# Altium PCB PCB1.PcbDoc
Units mil, origin at the board's own origin, x right, y up, seen from the top; angles counter-clockwise.
Board outline 1869.87 x 1869.87 mil, 2 copper layers (Top Layer, Bottom Layer); 39 components, 22 nets, 157 pads, 45 vias.
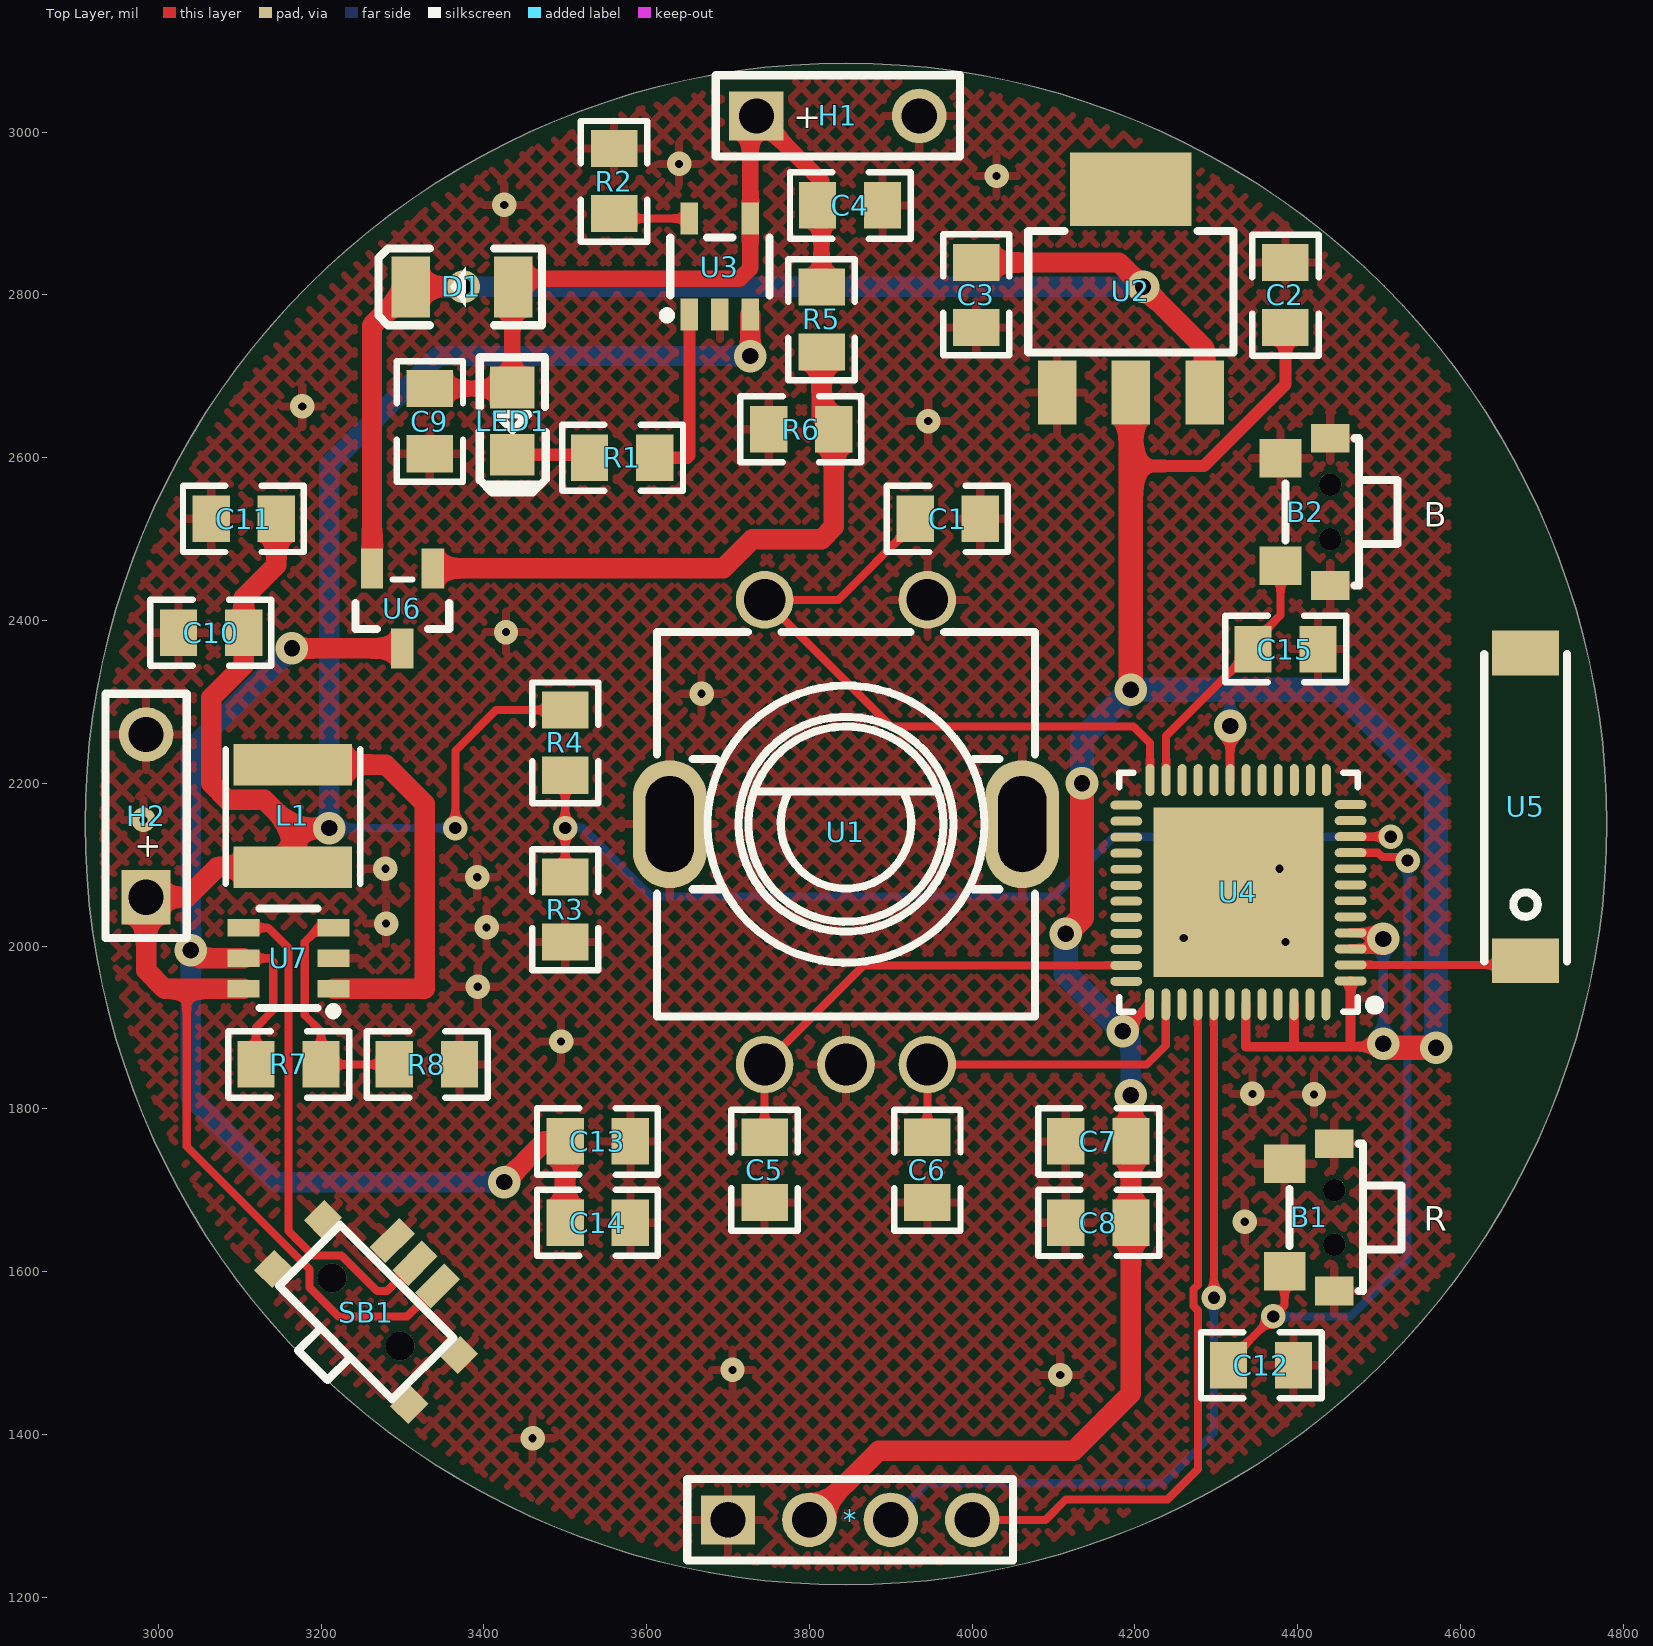
[diagram p0: Top Layer view]
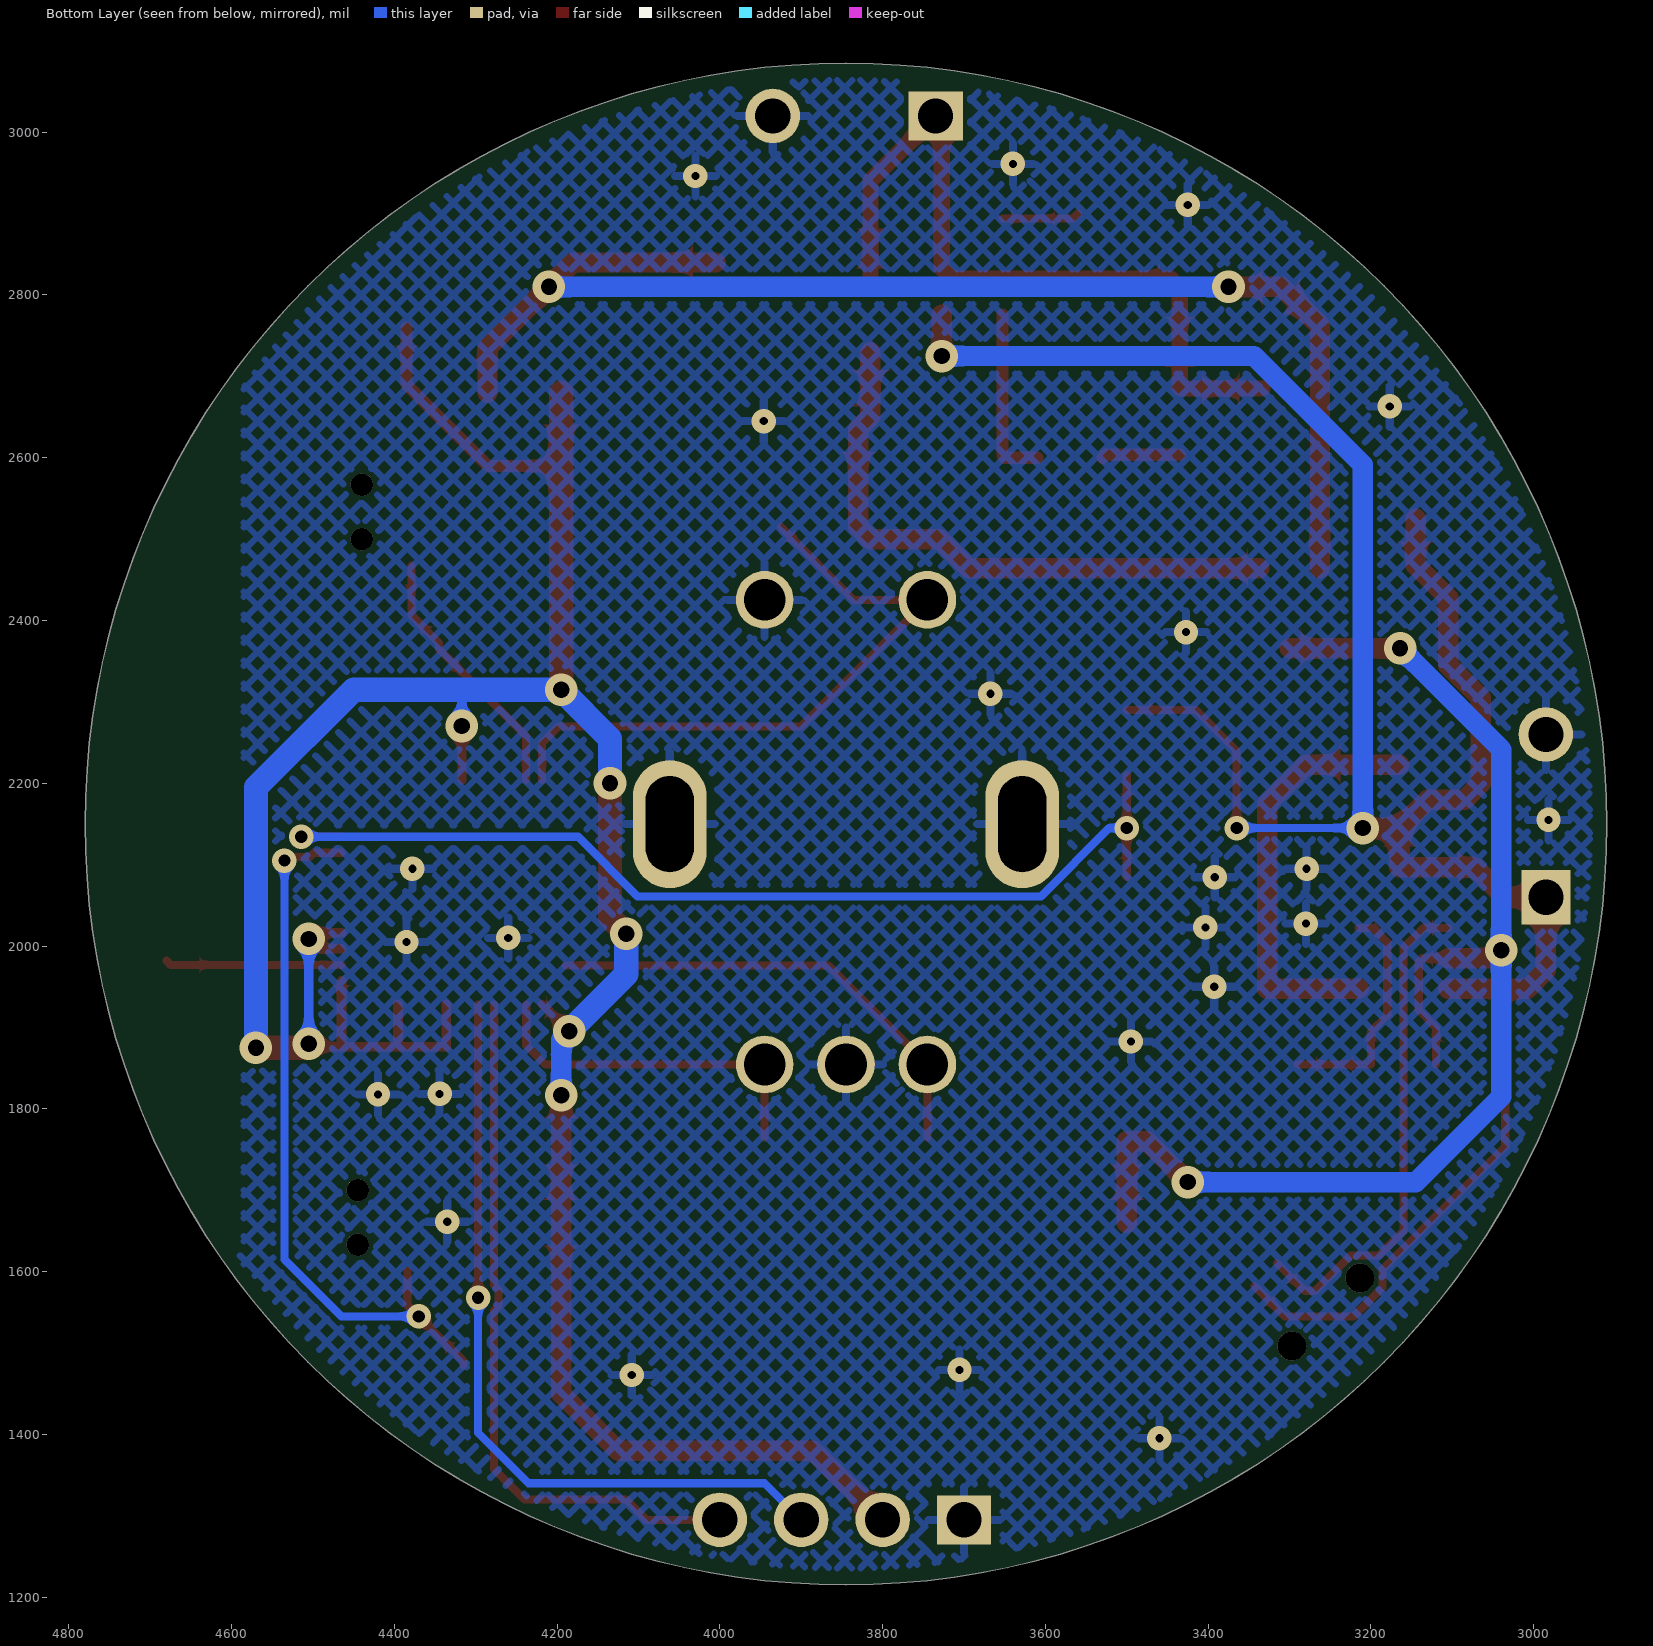
[diagram p1: Bottom Layer view, seen from below]

## Layer stack, top to bottom
Top Solder: solder mask 0.4, Solder Resist, Dk 3.5
Top Layer: signal copper 1.4
Dielectric 1: dielectric 12.6, FR-4, Dk 4.8
Bottom Layer: signal copper 1.4
Bottom Solder: solder mask 0.4, Solder Resist, Dk 3.5

## Board outline
2910.07,2150 ccw(c3845,2150) 3845,1215.07 ccw(c3845,2150) 4779.93,2150 ccw(c3845,2150) 3845,3084.93 ccw(c3845,2150)

## Design rules (kind name [scope] priority, off if disabled: settings)
Clearance [All] p1: gap=5 ignorepadtopadclearanceinfootprint=FALSE
HoleSize HoleSize_1 [All] p1: absolutevalues=TRUE maxlimit=100 minlimit=1 maxpercent=80.000 minpercent=20.000
HoleSize [All] p2: absolutevalues=TRUE maxlimit=100 minlimit=1 maxpercent=80.000 minpercent=20.000
PolygonConnect [All] p1: connectstyle=Relief reliefconductorwidth=10 reliefentries=4 polygonreliefangle="90 Angle" airgapwidth=10
RoutingVias [All] p1: holewidth=15 width=30 viastyle="Through Hole" minholewidth=12 minwidth=24 maxholewidth=28 maxwidth=50
SolderMaskExpansion [All] p1: expansion=4
Width [All] p1: maxlimit=30 minlimit=5 preferedwidth=10 minimp=50.000000 maximp=50.000000 favimp=50.000000
29 further rules are at their usual default settings.

## Components (designator, comment, footprint, x,y, rotation, side; value= is the part's Value field where it differs from the comment)
* "h4" pin4 3700,1295 r0 top
B1 "button" button 4445,1700 r0 top
B2 "button" button 4440,2566.93 r0 top
C1 "0.1uf" 0805CAP 3970,2525 r0 top
C2 "10uF" 0805CAP 4385,2800 r90 top
C3 "10uF" 0805CAP 4005,2800 r270 top
C4 "22uf" 0805CAP 3850,2910 r180 top
C5 "0.1uf" 0805CAP 3745,1725 r90 top
C6 "0.1uf" 0805CAP 3945,1725 r90 top
C7 "0.1uf" 0805CAP 4155,1760 r180 top
C8 "10uf" 0805CAP 4155,1660 r180 top
C9 "1uF" 0805CAP 3333.62,2645 r90 top
C10 "10uF" 0805CAP 3065,2385 r0 top
C11 "0.1uF" 0805CAP 3105,2525 r0 top
C12 "0.1uf" 0805CAP 4355,1485 r180 top
C13 "0.1uF" 0805CAP 3540,1760 r0 top
C14 "22uF" 0805CAP 3540,1660 r0 top
C15 "0.1uf" 0805CAP 4385,2365 r180 top
D1 "D" 1206D 3377.99,2810 r0 top
H1 "BAT" BAT 3835,3020 r0 top
H2 "BAT" BAT 2985,2160 r90 top
L1 "10uH" LND 3165,2160 r270 top
LED1 "LED" 0805LED 3435,2645 r90 top
R1 "300R" 0805R 3570,2600 r180 top
R2 "2K" 0805R 3560,2940 r90 top
R3 "100k" 0805R 3500,2045 r90 top
R4 "100k" 0805R 3500,2250 r90 top
R5 "1k" 0805R 3815,2770 r90 top
R6 "10k" 0805R 3790,2635 r0 top
R7 "525k" 0805R 3160,1854.57 r180 top
R8 "100k" 0805R 3330,1854.57 r180 top
SB1 "SWITCH" SB 3270,1565 r45 top
U1 "旋转编码器" SW-TH_EC11XXXXXXXX 3845,2140 r0 top
U2 "AMS1117-3.3" AMS1117-3.3 4195,2805 r270 top
U3 "AP5054BES5" AP5054BES5 3690,2835 r0 top
U4 "ESP32" ESP32_PICO 4327.2,2066.2 r90 top
U5 "2.4G天线" 2.4G天线 4680,1982.05 r90 top
U6 "MOS" PMOS 3300,2415 r90 top
U7 "DC-DC" FP6715S6CTR 3160,1985 r90 top

## Footprints (in the part's own frame and the unit in brackets; to place one, negate y for a bottom-side part, rotate by r counter-clockwise, add the part's x,y. Pads: shape width x height; smd on the part's side, far side on the other; paste and mask are expansions set on the pad)
2.4G天线 [mil]
  rect 55.12x82.68 smd: 1(0,0) 2(377.95,0)
  silkscreen extent -1,-51 377,51
0805CAP [mm]
  rect 1.16x1.45 smd: 1(-1.016,0) 2(1.016,0)
  silkscreen extent -1.9,-1.03 1.87,1.04
0805LED [mil]
  rect 51.2x55.1 smd: 1(41.35,0) 2(-41.35,0)
  silkscreen extent -88,-41 78,40
0805R [mm]
  rect 1.16x1.45 smd: 1(-1.016,0) 2(1.016,0)
  silkscreen extent -1.9,-1.03 1.87,1.04
1206D [mm]
  rect 1.2x1.9 smd: 1(1.473,0) 2(-1.727,0)
  silkscreen extent -2.73,-1.2 2.37,1.2
AMS1117-3.3 [mm]
  rect 2x1.2 smd: 1(3.175,-2.3) 2(3.175,0) 3(3.175,2.3)
  rect 2.3x3.8 smd: 4(-3.175,0)
  silkscreen extent -1.87,-3.2 1.93,3.2
AP5054BES5 [mm]
  rect 0.55x1 smd: 1(-0.95,-1.5) 2(0,-1.5) 3(0.95,-1.5) 4(0.95,1.5) 5(-0.95,1.5)
  silkscreen extent -1.78,-1.65 1.55,0.9
BAT [mm]
  rect 1.7x1.524 hole 1.1: 1(-2.54,0)
  round 1.7 hole 1.1: 2(2.54,0)
  silkscreen extent -3.81,-1.27 3.81,1.27
button [mm]
  rect 1.2x0.9 smd: 1(0,1.45) 2(0,-3.15)
  rect 1.3x1.2 smd: 3(-1.55,0.825) 4(-1.55,-2.525)
  round 0.7 hole 0.7 unplated: ""(0,-1.7) ""(0,0)
  silkscreen extent -1.4,-3.15 2.1,1.45
ESP32_PICO [mm]
  oval 0.28x0.996 smd: 1(-2.769,-3.5) 2(-2.268,-3.5) 3(-1.768,-3.5) 4(-1.267,-3.5) 5(-0.767,-3.5) 6(-0.267,-3.5) 7(0.231,-3.5) 8(0.732,-3.5) 9(1.232,-3.5) 10(1.732,-3.5) 11(2.233,-3.5) 12(2.733,-3.5) 25(2.718,3.5) 26(2.217,3.5) 27(1.717,3.5) 28(1.217,3.5) 29(0.716,3.5) 30(0.216,3.5) 31(-0.282,3.5) 32(-0.782,3.5) 33(-1.283,3.5) 34(-1.783,3.5) 35(-2.283,3.5) 36(-2.784,3.5)
  oval 0.996x0.28 smd: 13(3.5,-2.743) 14(3.5,-2.243) 15(3.5,-1.742) 16(3.5,-1.242) 17(3.5,-0.742) 18(3.5,-0.241) 19(3.5,0.257) 20(3.5,0.757) 21(3.5,1.257) 22(3.5,1.758) 23(3.5,2.258) 24(3.5,2.758) 37(-3.5,2.769) 38(-3.5,2.268) 39(-3.5,1.768) 40(-3.5,1.267) 41(-3.5,0.767) 42(-3.5,0.267) 43(-3.5,-0.231) 44(-3.5,-0.732) 45(-3.5,-1.232) 46(-3.5,-1.732) 47(-3.5,-2.233) 48(-3.5,-2.733)
  rect 5.3x5.3 smd: 49(0,0)
  silkscreen extent -3.72,-4.4 3.72,3.72
FP6715S6CTR [mm]
  rect 0.55x1 smd: 1(-0.95,-1.4) 2(0,-1.4) 3(0.95,-1.4) 4(0.95,1.4) 5(0,1.4) 6(-0.95,1.4)
  silkscreen extent -1.78,-1.52 1.55,0.9
LND [mm]
  rect 1.3x3.7 smd: 1(-1.6,0) 2(1.6,0)
  silkscreen extent -2.08,-2.09 2.12,2.11
pin4 [mm]
  rect 1.7x1.524 hole 1.1: 1(0,0)
  round 1.7 hole 1.1: 2(2.54,0) 3(5.08,0) 4(7.62,0)
  silkscreen extent -1.27,-1.27 8.89,1.27
PMOS [mm]
  rect 1.25x0.7 smd: 1(1.25,-0.95) 2(1.25,0.95) 3(-1.25,0)
  silkscreen extent -0.65,-1.46 0.9,1.46
SB [mm]
  rect 1.3x0.7 smd: 1(1.625,1) 2(1.625,0) 3(1.625,-1)
  rect 0.9x0.8 smd: 4(-1.625,-3) 4(-1.625,3) 4(0.575,3) 4(0.575,-3)
  round 0.9 hole 0.9 unplated: ""(-0.525,1.501) ""(-0.525,-1.501)
  silkscreen extent -2.87,-2.5 0.83,2.5
SW-TH_EC11XXXXXXXX [mm]
  oval 2.3x4 hole 1.5 slot 3 at 90 deg: 6(5.5,0.25) 7(-5.5,0.25)
  round 1.8 hole 1.3: A(-2.54,-7.25) B(2.54,-7.25) C(0,-7.25) D(-2.54,7.25) E(2.54,7.25)
  silkscreen extent -5.9,-5.75 5.9,6.25

## Part data
C1 C2 C3 C4 C5 C6 C7 C8 C9 C10 C11 C12 C13 C14 C15: library part CAP
L1: library part LND
R1 R2 R3 R4 R5 R6 R7 R8: library part RES
U4: library part ESP32-PICO-D4
U6: library part PMOS
U7: library part FP6715S6CTR

## Via types
v1: diameter 30, hole 10, Top Layer to Bottom Layer, 23 vias
v2: diameter 40, hole 20, Top Layer to Bottom Layer, 16 vias
v3: diameter 30, hole 15, Top Layer to Bottom Layer, 6 vias

## Nets (pads, with @x,y where several pads share a name; then routed paths per layer and width w, separated by ;. In a path a pad name is that pad's centre, name@x,y a point inside that pad or via, vN(x,y) a via of type N, cw(c..) or ccw(c..) an arc to the next point about the centre after c; other vN are vias at no path point)
5+: C3.1 D1.2 U2.3 U6.2 | length 1644.2
  Top Layer w25: U6.2 3262.6,2762.6 D1.2 v2(3375,2810) ; C3.1 4180,2840 v2(4210,2810) 4285.55,2734.45 U2.3
  Bottom Layer w25: v2(3375,2810) v2(4210,2810)
+3.3: *.2 C2.1 C7.1 C8.1 U2.2 U4.1 U4.3 U4.4 U4.19 U4.37 U4.43 U4.46 | length 3606.2
  Top Layer w11: v2(4185,1895.2) U4.37 ; U4.19 v2(4317.1,2270.4) v2@4317.1,2274.6
  Top Layer w12: U4.43 4336.31,1876.31 4393.69,1876.31 ; U4.46 4395.4,1878.02 4393.69,1876.31 ; U4.1 4465,1880 4461.31,1876.31 ; U4.3 4492.84,1996.6 v2(4505,2008.76) 4497.46,2016.3 U4.4 ; v2(4505,1880) 4501.31,1876.31 4461.31,1876.31 ; 4393.69,1876.31 4461.31,1876.31
  Top Layer w15: 4195,2590 4285,2590 4385,2690 C2.1
  Top Layer w25: *.2 3885,1380 4125,1380 4195,1450 C8.1 C7.1 v2(4195,1816.69)
  Top Layer w30: v2(4115,2015) 4135,2035 v2(4135,2200) ; v2(4195,2315) 4195,2590 U2.2 ; v2(4505,1880) 4510,1875 v2(4570,1875)
  Bottom Layer w11: 4315,2315 4317.1,2312.89 v2(4317.1,2270.4)
  Bottom Layer w12: v2(4505,1880) v2(4505,2008.76)
  Bottom Layer w25: v2(4185,1895.2) 4195,1885.2 v2(4195,1816.69)
  Bottom Layer w30: v2(4115,2015) 4115,1965.2 v2(4185,1895.2) ; v2(4135,2200) 4135,2255 v2(4195,2315) 4315,2315 4450,2315 4570,2195 v2(4570,1875)
A: C5.2 U1.A U4.35 | length 584.4
  Top Layer w10: C5.2 U1.A 3866.73,1976.3 U4.35
B: C6.2 U1.B U4.38 | length 442.6
  Top Layer w10: C6.2 U1.B 4214.56,1854.57 4237.9,1877.9 U4.38
BAT+: C10.2 C11.2 H2.1 L1.2 R4.2 SB1.3 U3.3 U7.6 | length 3081.1
  Top Layer w10: 3035,1947.6 3035,1753.79 3185.87,1602.92 3185.87,1580.69 3221.56,1545 3305.68,1545 SB1.3 ; v3(3365,2145) 3365,2240 3415,2290 R4.2
  Top Layer w25: U7.6 3035,1947.6 3007.6,1947.6 2985,1970.2 H2.1 3035.6,2060 3072.61,2097.01 L1.2 3165,2145 ; C11.2 3145,2467.96 3105,2427.96 C10.2 3105,2345 3065,2305 3065,2199.82 3084.92,2179.9 3130.1,2179.9 3165,2145 ; v2(3210,2145) 3165,2145 ; v2(3727.4,2725) U3.3
  Bottom Layer w10: v2(3210,2145) v3(3365,2145)
  Bottom Layer w25: v2(3210,2145) 3210,2591.41 3343.59,2725 v2(3727.4,2725)
BAT_ADC: R3.2 R4.1 U4.10 | length 1253.9
  Top Layer w10: R3.2 v3(3500,2145) R4.1 ; U4.10 v3(4514.4,2134.4)
  Bottom Layer w10: v3(3500,2145) 3521.66,2145 3605.56,2061.11 4101.11,2061.11 4174.4,2134.4 v3(4514.4,2134.4)
D: C1.1 U1.D U4.24 | length 809.2
  Top Layer w10: C1.1@3925,2515 3835.43,2425.43 U1.D 3900.43,2270 4198.31,2270 4218.6,2249.7 U4.24
EN: SB1.2 U7.4 | length 613.1
  Top Layer w10: U7.4 3135.2,2022.4 3160,1997.6 3160,1650 3190.12,1619.88 3225.07,1619.88 3268.96,1575.99 3280.99,1575.99 SB1.2
GND: *.1 B1.1 B1.2 B1.3 B2.1 B2.2 B2.3 C1.2 C2.2 C3.2 C4.1 C5.1 C6.1 C7.2 C8.2 C9.1 C10.1 C11.1 C12.1 C13.2 C14.2 C15.1 H1.2 H2.2 R2.2 R3.1 R6.1 R8.1 SB1.1 SB1.4 U1.6 U1.7 U1.C U1.E U2.1 U3.2 U4.49 U7.2
  other v1: 3460,1395.25 4108.25,1472.92 3705.59,1479.27 4335,1661.27 4344.39,1818.46 4420,1817.85 3495,1882.8 3392.5,1950 4385,2005 4260,2010 3403.36,2023.01 3280,2027.58 3391.84,2084.55 3279.01,2095 4377.73,2095 2981.8,2155 3667.64,2310 3427.22,2385.85 3946.08,2645 3176.84,2663.06 3425,2910.68 4030,2946.24 3640,2961.18
Net*_3: *.3 U4.41 | length 967.7
  Top Layer w10: v3(4297.01,1567.99) U4.41
  Bottom Layer w10: *.3 3945,1340 4235,1340 4297.01,1402.01 v3(4297.01,1567.99)
Net*_4: *.4 U4.40 | length 878.6
  Top Layer w10: *.4 4090,1295 4115,1320 4240,1320 4277.31,1357.31 4277.31,1552.34 4272.01,1557.64 4272.01,1578.35 4277.31,1583.65 U4.40
NetB1_4: B1.4 C12.2 U4.9 | length 911
  Top Layer w10: C12.2 4315,1490 v3(4370,1545) 4383.98,1558.98 B1.4 ; U4.9 4498.74,2114.7 4504.04,2109.4 4539.4,2109.4 v3(4535,2105)
  Bottom Layer w10: v3(4370,1545) 4465,1545 4535,1615 v3(4535,2105)
NetB2_4: B2.4 C15.2 U4.23 | length 321.8
  Top Layer w10: U4.23 4238.31,2258.3 C15.2 4345,2372.6 4378.98,2406.58 B2.4
NetC13_1: C13.1 C14.1 R7.2 U6.3 U7.5 | length 1604.4
  Top Layer w10: U7.5 3137.05,1985 3141.24,1980.81 3141.24,1921.24 3120,1900 R7.2
  Top Layer w25: v2(3040,1995) 3050,1985 U7.5 ; v2(3164.2,2365.8) U6.3 ; v2(3425,1710) 3475,1760 C13.1 C14.1
  Bottom Layer w25: v2(3164.2,2365.8) 3040,2241.6 v2(3040,1995) 3040,1815 3145,1710 v2(3425,1710)
NetL1_1: L1.1 U7.1 | length 522.2
  Top Layer w25: L1.1 3279.42,2222.99 3327.6,2174.81 3327.6,1947.6 U7.1
NetLED1_2: LED1.2 R1.2 | length 96.5
  Top Layer w15: LED1.2 3526.35,2603.65 R1.2
NetR1_1: R1.1 U3.1 | length 217
  Top Layer w15: R1.1 3650,2600 3652.6,2602.6 U3.1
NetR2_1: R2.1 U3.5 | length 95.1
  Top Layer w10: R2.1 3565.95,2894.05 U3.5
NetR5_1: R5.1 R6.2 U6.1 | length 734.9
  Top Layer w25: U6.1 3694.2,2464.2 3729.99,2500 3815,2500 3830,2515 R6.2 3815,2650 R5.1
NetR7_1: R7.1 R8.2 U7.3 | length 291
  Top Layer w10: U7.3 3197.4,2022.4 3180,2005 3180,1915 3200,1895 R7.1 R8.2
NetU4_2: U4.2 U5.1 | length 217.1
  Top Layer w10: U4.2 4674.85,1976.9 U5.1
VIN: C4.2 C9.2 D1.1 H1.1 LED1.1 R5.2 U3.4 | length 960.2
  Top Layer w20: C9.2 3433.65,2685 LED1.1 3435,2809.01 D1.1 3445.99,2820 3714.37,2820 3727.4,2833.03 U3.4 3727.4,3012.4 H1.1 3815,2940 R5.2
pads on no net: B1. B2. SB1. U2.4 U4.5 U4.6 U4.7 U4.8 U4.11 U4.12 U4.13 U4.14 U4.15 U4.16 U4.17 U4.18 U4.20 U4.21 U4.22 U4.25 U4.26 U4.27 U4.28 U4.29 U4.30 U4.31 U4.32 U4.33 U4.34 U4.36 U4.39 U4.42 U4.44 U4.45 U4.47 U4.48 U5.2

## Polygon pours and split planes (outlines as drawn)
GND on Top Layer "Top Layer-No Net" (hatched 45Degree grid 20 track 8, pour order 0): 4579.14,1605.06 cw(c3844.99,2149.84) 4584.05,2687.95 cw(c4580,2685) 4585.02,2685 4585.02,1626.51 cw(c4584.91,1621.5) 4589.92,1621.5 cw(c4584.91,1621.5) 4588.99,1618.58 cw(c3844.99,2149.84) 4585.02,1613.06 4585.02,1610 cw(c4580,1610)
GND on Bottom Layer "Bottom Layer-No Net" (hatched 45Degree grid 20 track 8, pour order 1): 4579.14,1605.06 cw(c3844.99,2149.84) 4584.05,2687.95 cw(c4580,2685) 4585.02,2685 4585.02,1626.51 cw(c4584.91,1621.5) 4589.92,1621.5 cw(c4584.91,1621.5) 4588.99,1618.58 cw(c3844.99,2149.84) 4585.02,1613.06 4585.02,1610 cw(c4580,1610)

## Silkscreen, mask and mechanical layers (free items; w line width, h text height)
Top Overlay:
  text "B" at 4555,2515 h30
  text "R" at 4555,1650.3 h30
Mechanical 1:
  circle w10: c3845,2150 r934.93

## Text inside footprints (layer, text, board x,y; h text height)
H1: Top Overlay "+" at 3780,3005 h30
H2: Top Overlay "+" at 3000,2105 h30 r90